# EAGLE board PCBLayout (EAGLE 9.6.2)
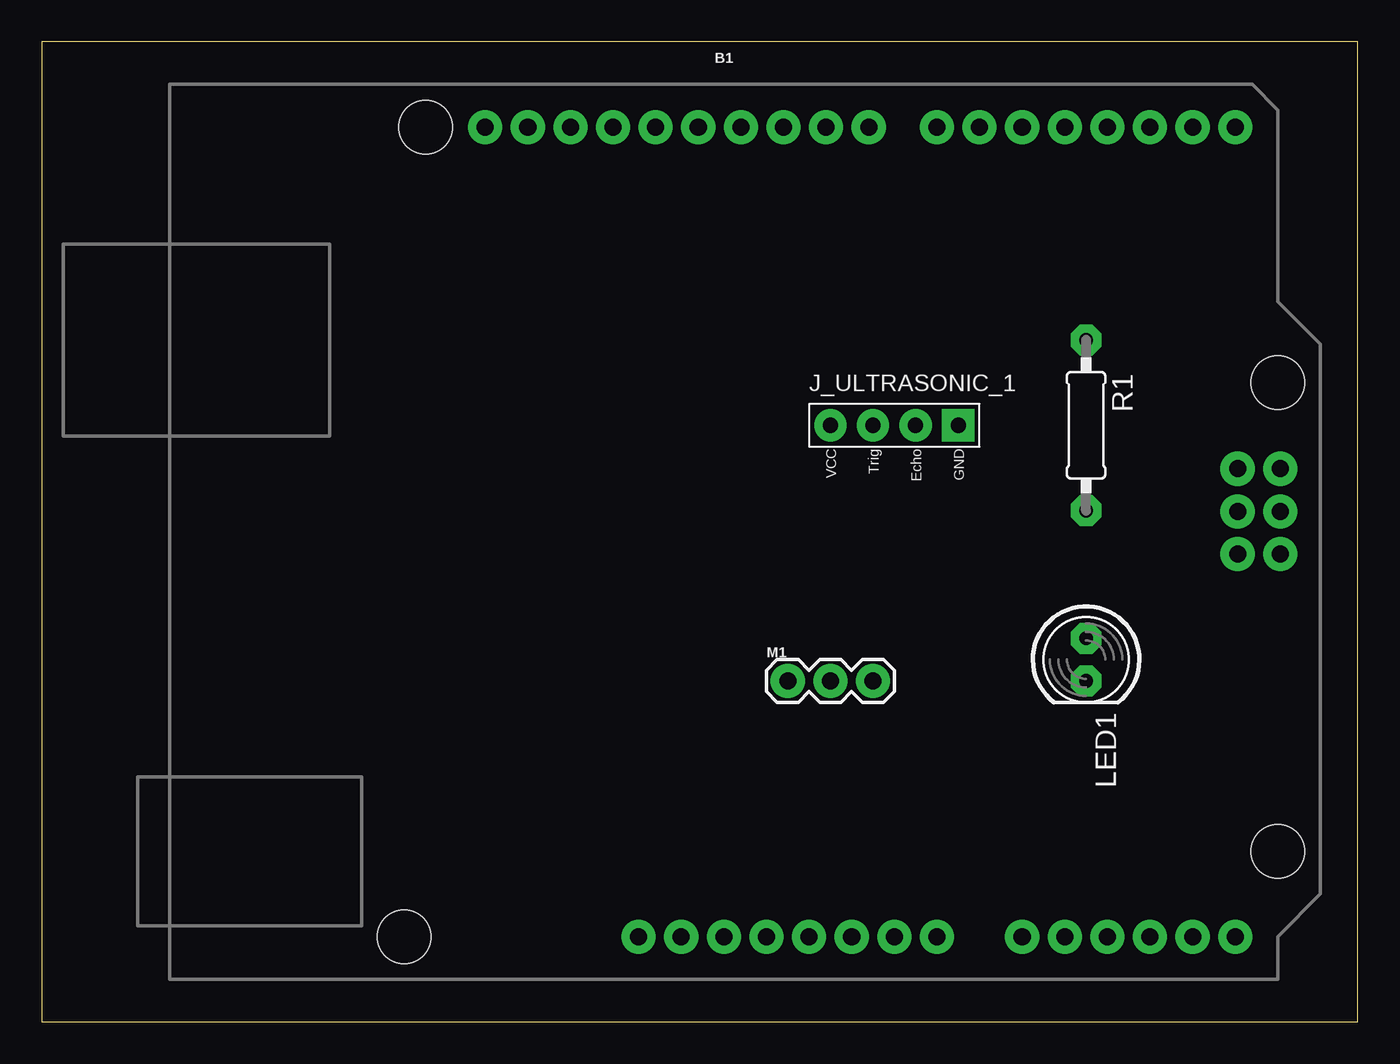
[diagram p0: board, top side]
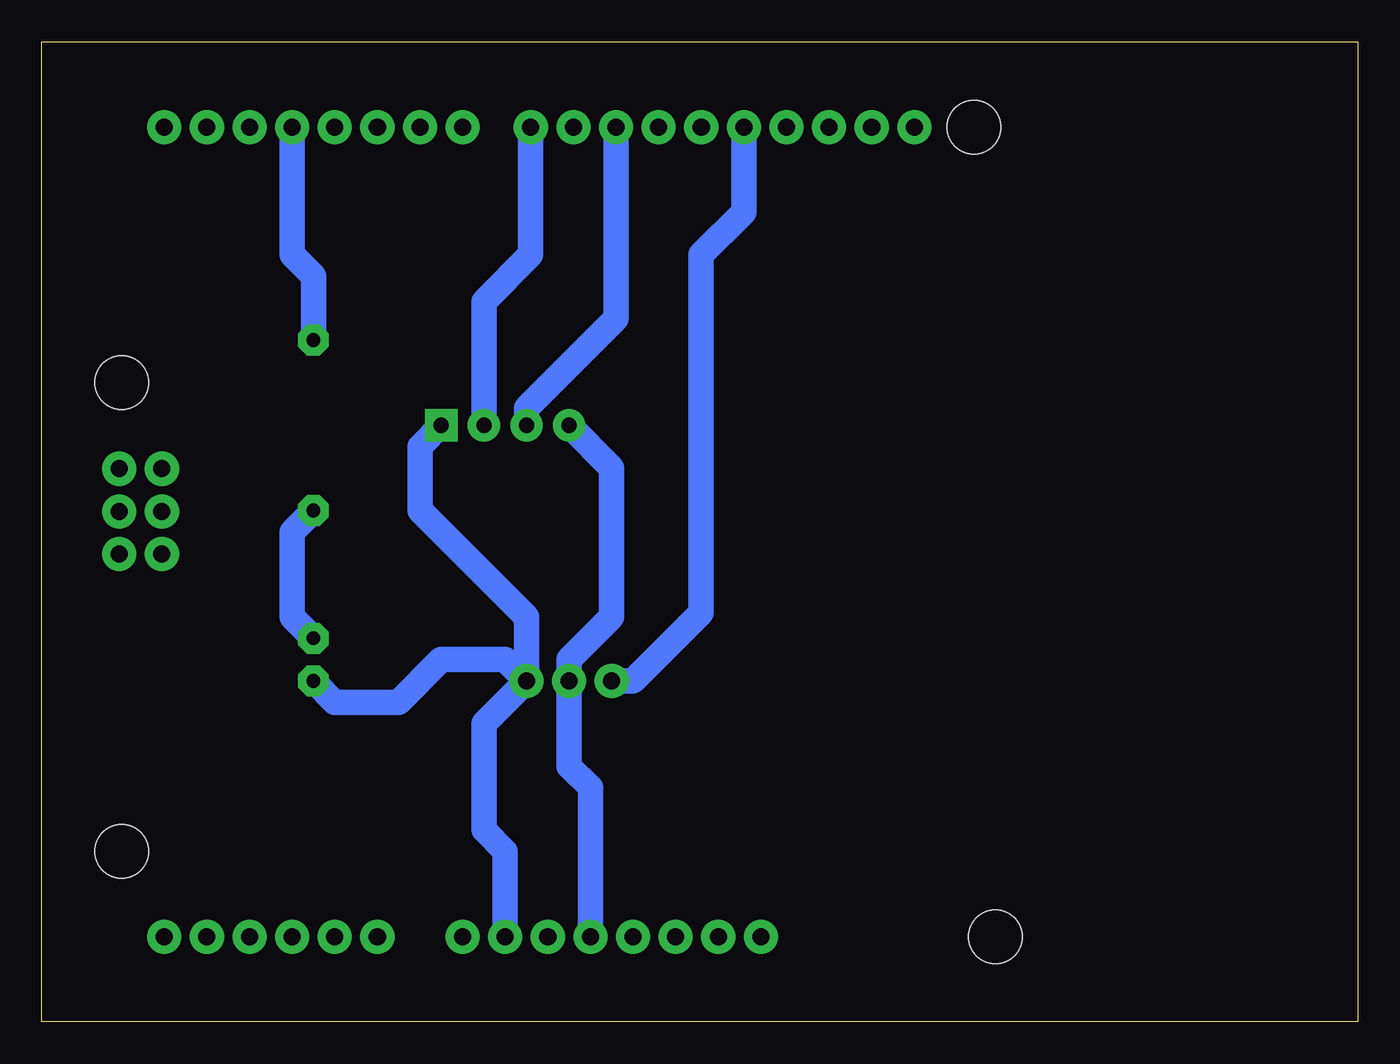
[diagram p1: board, bottom side, seen from below]

Size 78.41 x 58.41 mm. Coordinates in mm from the lower left corner, seen from the top.
Outline: 0,0 78.41,0 78.41,58.41 0,58.41 0,0
Copper layers (1*16): Top 0.035mm / dielectric 1.5mm / Bottom 0.035mm
Design rules "default *": minimum track width 6mil, minimum drill 0.35mm, track to track 6mil, track to pad 6mil, pad to pad 6mil, via to via 6mil, smd to smd 6mil, copper to edge 40mil, drill to drill 6mil, minimum pad ring 20mil, minimum via ring 8mil, stop-mask expansion 4mil, vias tented up to drill 0mil, thermal gap 10mil

## Footprints (pad centres in the part's own frame; a part is rotated, then mirrored left to right if it is on the bottom)
ARDUINO_R3 = drill 1.016 pad 1.93: 3.3V 2.54,-24.13; 5V 5.08,-24.13; A0 17.78,-24.13; A1 20.32,-24.13; A2 22.86,-24.13; A3 25.4,-24.13; A4 27.94,-24.13; A5 30.48,-24.13; AREF -9.144,24.13; D0 30.48,24.13; D1 27.94,24.13; D2 25.4,24.13; D3 22.86,24.13; D4 20.32,24.13; D5 17.78,24.13; D6 15.24,24.13; D7 12.7,24.13; D8 8.636,24.13; D9 6.096,24.13; D10 3.556,24.13; D11 1.016,24.13; D12 -1.524,24.13; D13 -4.064,24.13; GND@1 7.62,-24.13; GND@2 10.16,-24.13; GND@3 -6.604,24.13; GND@4 33.16,-1.32; IOREF -2.54,-24.13; MISO 30.62,3.76; MOSI 33.16,1.22; NC -5.08,-24.13; RESET@1 0,-24.13; RESET@2 30.62,-1.32; SCK 30.62,1.22; SCL -14.224,24.13; SDA -11.684,24.13; VCC 33.16,3.76; VIN 12.7,-24.13 | hole 3.175: -17.78,24.13; 33.02,8.89; 33.02,-19.05; -19.05,-24.13
HC-SR04_FOOTPRINT = drill 0.9 pad 1.778: ECHO 0,1.27; TRIG 0,-1.27; VCC 0,-3.81 | drill 0.9 pad 1.778 square: GND 0,3.81
LED5MM = drill 0.813 octagon: A -1.27,0; K 1.27,0
1X03 = drill 1.016 pad 1.88: 1 0,0; 2 2.54,0; 3 5.08,0
0207/10 = drill 0.813 octagon: 1 -5.08,0; 2 5.08,0

## Placement (x,y rotation side)
B1  ARDUINO_UNO_R3  [ARDUINO_R3]  40.64,29.21 0 top
J_ULTRASONIC_1  HC-SR04  [HC-SR04_FOOTPRINT]  50.8,35.56 270 top
LED1  RED  [LED5MM]  62.23,21.59 270 top
M1  SERVO  [1X03]  44.45,20.32 0 top
R1  1k  [0207/10]  62.23,35.56 270 top

## Library data of the parts
B1 = SparkFun-Boards
J_ULTRASONIC_1 = Ultrasonic Sensor HC-SR04
LED1 = led
M1 = SparkFun-Electromechanical
R1 = rcl; SPICEPREFIX: R

## Nets
N$1: B1.D8 J_ULTRASONIC_1.ECHO
N$2: B1.D10 J_ULTRASONIC_1.TRIG
N$3: B1.GND@2 J_ULTRASONIC_1.GND LED1.K M1.3
N$4: B1.5V J_ULTRASONIC_1.VCC M1.2
N$5: B1.D13 M1.1
N$6: LED1.A R1.2
N$7: B1.D3 R1.1

## Tracks (layer width: path | path; a pad name or v marks a point on that pad's centre or on a via)
N$1
  Bottom 1.524: J_ULTRASONIC_1.ECHO 52.07,42.93 49.28,45.72 B1.D8
N$2
  Bottom 1.524: B1.D10 44.2,41.91 49.53,36.58 J_ULTRASONIC_1.TRIG
N$3
  Bottom 1.524: M1.3 52.07,17.78 52.07,11.43 50.8,10.16 B1.GND@2 | J_ULTRASONIC_1.GND 55.88,34.29 55.88,30.48 49.53,24.13 M1.3 | LED1.K 60.96,19.05 57.15,19.05 54.61,21.59 50.8,21.59 M1.3
N$4
  Bottom 1.524: B1.5V 45.72,13.97 46.99,15.24 M1.2 46.99,21.59 44.45,24.13 44.45,33.02 J_ULTRASONIC_1.VCC
N$5
  Bottom 1.524: M1.1 43.18,20.32 39.12,24.38 39.12,45.72 36.58,48.26 B1.D13
N$6
  Bottom 1.524: R1.2 63.5,29.21 63.5,24.13 LED1.A
N$7
  Bottom 1.524: R1.1 62.23,44.45 63.5,45.72 B1.D3